# Altium PCB IMU_PCB_2024_4Layers_noBlindVias.PcbDoc
Units mm, origin at the board's own origin, x right, y up, seen from the top; angles counter-clockwise.
Board outline 9 x 7 mm, 4 copper layers (Top Layer, Top Layer 1, Bottom Layer 1, Bottom Layer), stack 0.537 mm thick; 16 components, 21 nets, 87 pads, 36 vias.
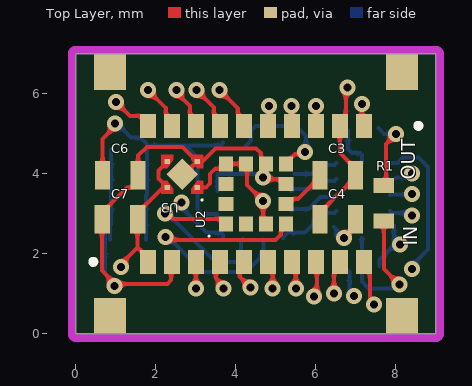
[diagram p0: Top Layer view]
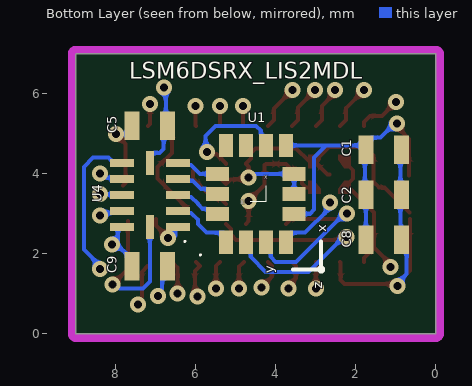
[diagram p1: Bottom Layer view, seen from below]
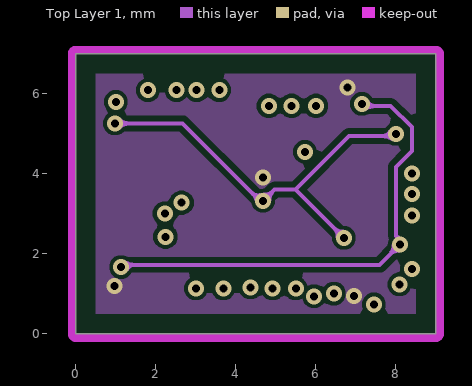
[diagram p2: Top Layer 1]
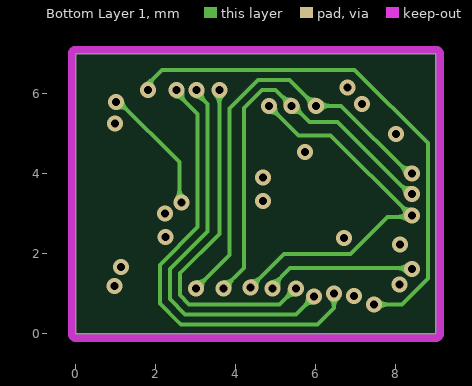
[diagram p3: Bottom Layer 1]
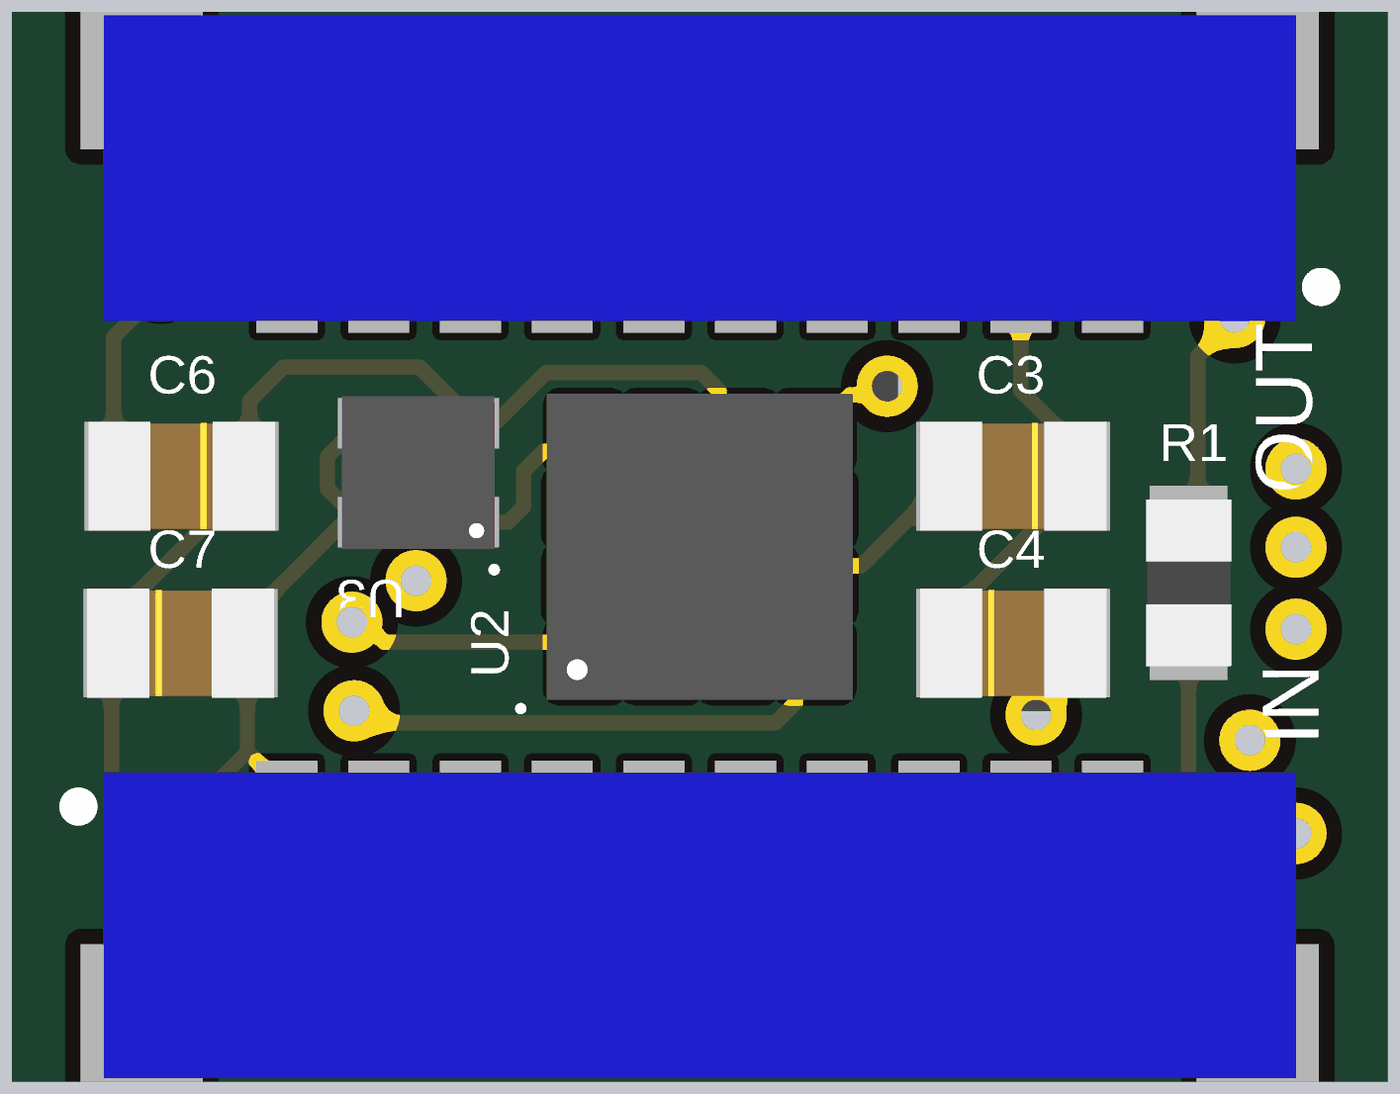
[diagram p4: 3D render of the assembled board from above, using the file's embedded part models]
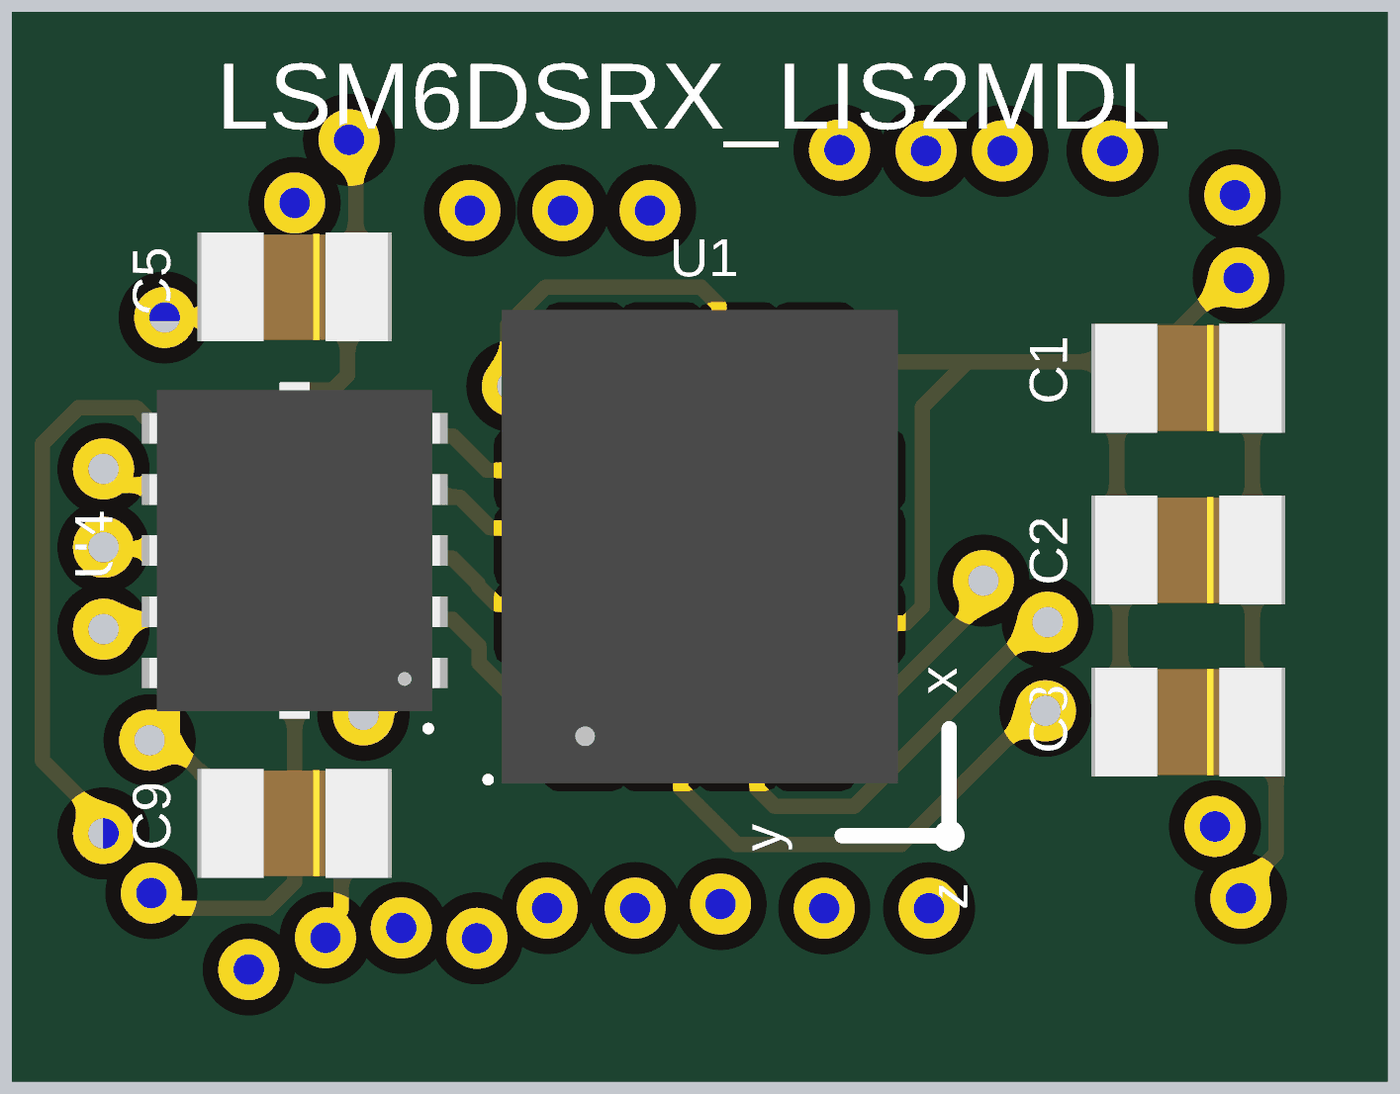
[diagram p5: 3D render of the assembled board from below, using the file's embedded part models]

## Layer stack, top to bottom
Top Solder: solder mask 0.0102, Solder Resist, Dk 3.5
Top Layer: signal copper 0.0356
Dielectric 2: prepreg 0.0711, PP-006, Dk 4.1
Top Layer 1: signal copper 0.035
Dielectric 1: core 0.254, FR-4, Dk 4.2
Bottom Layer 1: signal copper 0.035
Dielectric 3: prepreg 0.0711, PP-006, Dk 4.1
Bottom Layer: signal copper 0.0356
Solder Side: solder mask 0.0102, Solder Resist, Dk 3.5

## Board outline
0,7 0,0 9,0 9,7

## Design rules (kind name [scope] priority, off if disabled: settings)
Clearance Clearance_tracks [All] p1: gap=0.1 ignorepadtopadclearanceinfootprint=FALSE except(0: Arc-Hole Track-Hole SMDPad-Hole THPad-Hole Via-Hole Fill-Hole Poly-Hole Region-Hole Text-Hole; 0.15: Arc-Arc Arc-Track Arc-SMDPad Arc-THPad Arc-Via Arc-Fill Arc-Poly Arc-Region Track-Track Track-SMDPad Track-THPad Track-Via Track-Fill Track-Poly Track-Region)
Clearance Clearance_3 [OnLayer('Power Plane (VCC)') or InNet('4V')] p2: gap=0.254 ignorepadtopadclearanceinfootprint=FALSE except(0: Arc-Hole Track-Hole SMDPad-Hole THPad-Hole Via-Hole Fill-Hole Poly-Hole Region-Hole Text-Hole)
Clearance Clearance_2 [(InComponent('MPU-9250') AND OnLayer('Bottom Layer') AND HasFootprint('MPU-2950'))] p3: gap=0.1 ignorepadtopadclearanceinfootprint=FALSE except(0: Arc-Hole Track-Hole SMDPad-Hole THPad-Hole Via-Hole Fill-Hole Poly-Hole Region-Hole Text-Hole)
Clearance keepout [OnLayer('Keep-Out Layer')] p4: gap=0.1 ignorepadtopadclearanceinfootprint=FALSE except(0: Arc-Hole Track-Hole SMDPad-Hole THPad-Hole Via-Hole Fill-Hole Poly-Hole Region-Hole Text-Hole)
Clearance "Clearance - Vias Pad" [IsVia vs IsPad] p5: gap=0.1 ignorepadtopadclearanceinfootprint=FALSE except(0: Arc-Hole Track-Hole SMDPad-Hole THPad-Hole Via-Hole Fill-Hole Poly-Hole Region-Hole Text-Hole)
Clearance "Clearance Pad to Pad" [IsPad vs IsPad] p6: gap=0.1 ignorepadtopadclearanceinfootprint=FALSE except(0: Arc-Hole Track-Hole SMDPad-Hole THPad-Hole Via-Hole Fill-Hole Poly-Hole Region-Hole Text-Hole)
Clearance [All] p7: gap=0.1 ignorepadtopadclearanceinfootprint=FALSE except(0: Arc-Hole Track-Hole SMDPad-Hole THPad-Hole Via-Hole Fill-Hole Poly-Hole Region-Hole Text-Hole)
DiffPairsRouting [All] p1: maxlimit=0.254 minlimit=0.254 mostfreqgap=0.254 toplayer_minwidth=0.2 toplayer_maxwidth=0.381 toplayer_prefwidth=0.254 midlayer1_minwidth=0.2 midlayer1_maxwidth=0.381 midlayer1_prefwidth=0.254 midlayer2_minwidth=0.2 midlayer2_maxwidth=0.381 midlayer2_prefwidth=0.254 bottomlayer_minwidth=0.2 bottomlayer_maxwidth=0.381 bottomlayer_prefwidth=0.254 maxuncoupledlength=12.7
HoleToHoleClearance [All] p1: gap=0.1 allowstackedmicrovias=TRUE
MinimumSolderMaskSliver [All] p1: minsoldermaskwidth=0.02
PlaneConnect [All] p1: planeconnectstyle=Direct reliefexpansion=0.508 reliefentries=4 reliefconductorwidth=0.254 reliefairgap=0.254
PolygonConnect [All] p1: connectstyle=Direct reliefconductorwidth=0.254 reliefentries=4 polygonreliefangle="90 Angle" airgapwidth=0.254
RoutingLayers RoutingLayersPWR [(InNet('4V') OR InNet('5V') OR InNet('5V NON ISOLATED'))] p2: top layer_v5=TRUE mid layer 1_v5=TRUE mid layer 2_v5=TRUE bottom layer_v5=TRUE
RoutingPriority "RountingPriority Power" [(InNet('GND') OR InNet('POWER GND') OR InNet('5V') OR InNet('5V NON ISOLATED') OR InNet('24V'))] p1: routingpriority=10
RoutingPriority "RoutingPriority RS485" [(InNet('RS485_N') OR InNet('RS485_P'))] p2: routingpriority=8
RoutingPriority "RoutingPriority Hard Ones" [(InNet('SIGNAL 1 A') OR InNet('SIGNAL 1 B') OR InNet('SIGNAL 1 C') OR InNet('SIGNAL 3 A') OR InNet('SIGNAL 3 B') OR InNet('SIGNAL 3 C'))] p3: routingpriority=6
RoutingPriority [All] p4: routingpriority=0
RoutingVias [All] p1: holewidth=0.2 width=0.4 viastyle="Through Hole" minholewidth=0.2 minwidth=0.4 maxholewidth=0.35 maxwidth=0.7
SMDNeckDown [All] p1: percent=90.000
SilkToSilkClearance [All] p1: silktosilkclearance=0.1
SilkToSolderMaskClearance SilkscreenOverComponentPads [IsPad] p1: minsilkscreentomaskgap=0.02 clearancetoexposedcopper=FALSE
SolderMaskExpansion SolderMaskExpansion_via [IsVia] p1: expansion=-0.4 istentingtop=FALSE
SolderMaskExpansion [All] p2: expansion=0.102 istentingtop=FALSE
Width [All] p1: maxlimit=2 minlimit=0.1 preferedwidth=0.1 minimp=50.000000 maximp=50.000000 favimp=50.000000
Width "Width PowerPlane" [All] p2: maxlimit=0.635 minlimit=0.508 preferedwidth=0.508
23 further rules are at their usual default settings.

## Components (designator, comment, footprint, x,y, rotation, side; value= is the part's Value field where it differs from the comment)
C1 "100nF" C0402 1.304,4.603 r0 bottom
C2 "100nF" C0402 1.304,3.478 r0 bottom
C3 "220nF" C0402 6.55,3.962 r180 top
C4 "100nF" C0402 6.55,2.869 r0 top
C5 "10uF" C0402 7.15,5.2 r0 bottom
C6 "1uF" C0402 1.111,3.962 r180 top
C7 "1uF" C0402 1.104,2.869 r0 top
C8 "100nF" C0402 1.304,2.353 r0 bottom
C9 "100nF" C0402 7.15,1.69 r0 bottom
IN "JST SM10B-XSRS-ETB" SM10B-XSRS-ETB 4.5,1.8 r0 top
OUT "JST SM10B-XSRS-ETB" SM10B-XSRS-ETB 4.5,5.2 r180 top
R1 "10K" R0402 7.073,-0.211 r90 top
U1 "LSM6DSRXTR" LSM6 4.5,3.5 r90 bottom locked
U2 "LIS2MDLTR" LIS 4.5,3.5 r90 top
U3 "LD39020ADTPU18R" LD3 2.66,3.985 r180 top
U4 "HPA01164RUTR" RUT12 7.15,3.475 r0 bottom locked

## Footprints (in the part's own frame and the unit in brackets; to place one, negate y for a bottom-side part, rotate by r counter-clockwise, add the part's x,y. Pads: shape width x height; smd on the part's side, far side on the other; paste and mask are expansions set on the pad)
C0402 [mil]
  rect 15x28 smd paste+0 mask+0: 1(-17.5,0) 2(17.5,0)
  body extent -24,-14 24,14, height 28
LD3 [mil]
  rect 5x5 smd paste-2.5 mask-2.5: 1(-14.75,12.75) 2(-14.75,-12.75) 3(14.75,-12.75) 4(14.75,12.75)
  rect 22x22 smd rot 45 paste-11 mask+0: 5(0,0)
  Top Layer region: 0,11 0,11 0,11 0,11 0,11 0,11 0,11 0,11
  Top Layer region: 0,-11 0,-11 0,-11 0,-11 0,-11 0,-11 0,-11 0,-11
  Top Layer region: 20.75,19.25 20.75,6.25 14.75,6.25 8.75,14.25 8.75,19.25
  Top Layer region: -20.75,-19.25 -20.75,-6.25 -14.75,-6.25 -8.75,-14.25 -8.75,-19.25
  Top Layer region: 20.75,-19.25 20.75,-6.25 14.75,-6.25 8.75,-14.25 8.75,-19.25
  Top Layer region: -20.75,19.25 -20.75,6.25 -14.75,6.25 -8.75,14.25 -8.75,19.25
  silkscreen extent -20,25 -19,25, body extent -20,-20 20,20, height 16
LIS [mm]
  rect 0.377x0.352 smd paste+0 mask+0.102: 1(-0.75,0.75) 2(-0.75,0.25) 3(-0.75,-0.25) 4(-0.75,-0.75) 7(0.75,-0.75) 8(0.75,-0.25) 9(0.75,0.25) 10(0.75,0.75)
  rect 0.352x0.377 smd paste+0 mask+0.102: 5(-0.25,-0.75) 6(0.25,-0.75) 11(0.25,0.75) 12(-0.25,0.75)
  silkscreen extent -1.07,1.16 -1.05,1.18, body extent -1,-1 1,1, height 0.7
LSM6 [mm]
  rect 0.577x0.352 smd paste+0 mask+0.102: 1(-1.21,0.75) 2(-1.21,0.25) 3(-1.21,-0.25) 4(-1.21,-0.75) 8(1.21,-0.75) 9(1.21,-0.25) 10(1.21,0.25) 11(1.21,0.75)
  rect 0.352x0.577 smd paste+0 mask+0.102: 5(-0.5,-0.956) 6(0,-0.956) 7(0.5,-0.956) 12(0.5,0.956) 13(0,0.956) 14(-0.5,0.956)
  silkscreen extent -1.54,-0.25 0.2,1.4, body extent -1.55,-1.3 1.55,1.3, height 0.87
R0402 [mil]
  rect 15x20 smd paste+0 mask+0: 1(119.31,-24.61) 2(154.31,-24.61)
  body extent 115,-36 158,-14, height 16
RUT12 [mm]
  rect 0.6x0.2 smd paste+0 mask+0: 1(-0.7,0.8) 2(-0.7,0.4) 3(-0.7,0) 4(-0.7,-0.4) 5(-0.7,-0.8) 7(0.7,-0.8) 8(0.7,-0.4) 9(0.7,0) 10(0.7,0.4) 11(0.7,0.8)
  rect 0.2x0.6 smd paste+0 mask+0: 6(0,-0.8) 12(0,0.8)
  silkscreen extent -0.89,1.15 -0.86,1.18, body extent -0.95,-1.1 0.95,1.1, height 0.6
SM10B-XSRS-ETB [mm] "JST XSR 10WAY angle, 0.6mm, SMD"
  rect 0.4x0.6 smd mask+0.05: 1(-2.7,0) 2(-2.1,0) 3(-1.5,0) 4(-0.9,0) 5(-0.3,0) 6(0.3,0) 7(0.9,0) 8(1.5,0) 9(2.1,0) 10(2.7,0)
  rect 0.8x0.9 smd: NC(-3.65,-1.35) NC(3.65,-1.35)
  silkscreen extent -4.11,-0.05 -4.01,0.05, body extent -3.9,-1.78 3.9,0.22, height 1.44

## Part data
C1 C2 C4 C8 C9: library part 04025C104KAT4A, "04025C104KAT4A", Mfr_Name=TDK
C3: library part C1005X5R1E224K050BC, "C1005X5R1E224K050BC", Mfr_Name=TDK
C5: library part 0402ZD106MAT2A, "0402ZD106MAT2A", Mfr_Name=TDK
C6 C7: library part 04023D105KAT2A, "04023D105KAT2A", Mfr_Name=TDK
IN OUT: library part SM10B-XSRS-ETB, "JST 10WAY angle XSR, SMT, 0.6mm, SM10B-XSRS-ETB", Manufacturer=JST, Supplier Part Number 1=90W0858, Catalogue Price=1,192, Category=Connecteurs, ComponentLink1Description=http://datasheet.octopart.com/SM10B-XSRS-ETB-JST-datasheet-12514066.pdf, ComponentLink1URL=http://datasheet.octopart.com/SM10B-XSRS-ETB-JST-datasheet-12514066.pdf, ComponentLink2Description=http://www.farnell.com/datasheets/1706598.pdf, ComponentLink2URL=http://www.farnell.com/datasheets/1706598.pdf, Contact Material=Copper, Contact Plating=Tin, Contact Termination Type="Through Hole", contact_material=Copper, contact_plating=Tin, Courant=0.2A, Currency=EUR, gender=Male, Manufacturer Part Number=SM10B-XSRS-ETB, Matériau du contact="Alliage de cuivre", Minimum Order Quantity=5, mounting_style="Through Hole", Méthode de raccordement="Montage en surface", No. of Contacts=10, No. of Rows=1, Nombre de contacts=10, Nombre de rangées=1, number_of_contacts=10, Numéro de série=SM10B, Octopart Url=http://octopart.com/sm10b-xsrs-etb-jst-29522047, OctopartID=60b7a87f3daebf70, Orientation du corps=Droit, Pas=0.6mm, Pitch Spacing=0.6, Product Range="XSR Series", Product Status=IN_STOCK, Product StockNumber=820-1677, RoHS=YES, rohs_status=Compliant, Seller Landing  Url=https://octopart-clicks.com/click/track?country=IT&ak=8157f166&sig=06796d5&sid=2402&ppid=29522047&vpid=200245201&ct=offers, Stock 1=0, Stock 2=0, Supplier 1=Newark, Supplier 2=RS-Components, Supplier Part Number 2=820-1677, Séries=XSR, Tension="30 V c.a./c.c.", Type="Fil à carte"
R1: library part RMCF0402FT10K0, "No Description Available", Mfr_Name="Stackpole International"
U1 U2 U3: "No Description Available", Mfr_Name=STMicroelectronics, RefDes=RefDes, Type=Type
U4: "No Description Available", Mfr_Name="Texas Instruments", RefDes=RefDes, Type=Type

## Via types
v1: diameter 0.4, hole 0.2, Top Layer to Bottom Layer, 36 vias

## Nets (pads, with @x,y where several pads share a name; then routed paths per layer and width w, separated by ;. In a path a pad name is that pad's centre, name@x,y a point inside that pad or via, vN(x,y) a via of type N, cw(c..) or ccw(c..) an arc to the next point about the centre after c; other vN are vias at no path point)
1V8: C1.2 C2.2 C4.2 C5.2 C6.2 C8.2 R1.2 U1.5 U1.8 U2.3 U2.9 U2.10 U3.1 U4.1 | length 25.8
  Top Layer w0.1: C6.2 0.667,4.871 0.97,5.174 v1@0.97,5.253 ; U3.1 3.248,3.661 3.348,3.761 3.348,3.995 3.479,4.126 3.626,4.126 U2.10 U2.9 4.281,4.219 4.281,3.727 4.583,3.425 4.583,3.359 v1@4.551,3.327 ; v1(4.681,3.327) v1@4.551,3.327 ; U2.3 4.681,2.819 4.681,3.197 v1@4.551,3.327 ; v1@6.757,2.457 v1(6.7,2.4) 6.7,2.409 6.994,2.704 C4.2 ; R1.2@7.82,3.709 7.757,3.772 7.757,4.748 8,4.99 v1(8,5)
  Top Layer 1 w0.1: v1(0.976,5.259) 2.67,5.259 4.559,3.37 4.734,3.37 4.971,3.606 5.494,3.606 ; v1(6.7,2.4) 5.494,3.606 ; v1(8,5) 7.944,4.944 6.832,4.944 5.494,3.606
  Bottom Layer w0.1: v1(0.976,5.259) 1.033,5.259 1.383,4.909 1.608,4.909 1.773,4.743 C1.2@1.773,4.603 ; C8.2 1.748,3.453 1.773,3.478 C1.2@1.773,4.603 ; U1.5 3.15,3 3.044,3.106 3.044,4.414 2.748,4.71 ; U1.8@3.682,4.786 3.682,4.768 3.624,4.71 2.748,4.71 ; U4.1 6.459,2.675 6.509,2.625 6.509,2.457 6.643,2.457 v1(6.7,2.4) ; C5.2@7.569,5.141 7.71,5 v1(8,5) ; C1.2@1.773,4.603 1.88,4.71 2.748,4.71
CSI: IN.6 U4.7 | length 8.3
  Top Layer w0.1: IN.6 4.922,1.678 v1(4.922,1.136)
  Bottom Layer 1 w0.1: v1(4.922,1.136) 4.922,1.209 5.354,1.641 8.384,1.641 v1(8.4,1.624)
  Bottom Layer w0.1: U4.7 8.05,4.275 8.184,4.409 8.566,4.409 8.8,4.175 8.8,2.103 8.4,1.703 v1(8.4,1.624)
Csi_1V8: U1.12 U4.5 | length 1.2
  Bottom Layer w0.1: U1.12@5.464,4 5.892,4 6.117,4.225 6.464,4.225 U4.5@6.514,4.275
GND: C1.1 C2.1 C3.1 C4.1 C5.1 C6.1 C7.1 C8.1 C9.1 IN.2 OUT.2 U1.6 U1.7 U2.6 U2.8 U3.2 U3.5 U4.6 | length 23.3
  Top Layer w0.1: C7.1@0.652,2.869 0.652,1.578 0.96,1.269 v1(0.96,1.2) ; C7.1@0.66,3.034 1.282,3.656 1.415,3.656 1.556,3.797 C6.1 ; v1@1,1.2 1.05,1.25 2.287,1.25 2.38,1.343 2.38,1.78 IN.2 ; C6.1 1.556,4.455 1.774,4.674 2.67,4.674 U3.2@3.021,4.322 ; U3.5 2.711,3.985 3.021,4.295 U3.2 ; U3.2@3.021,4.322 U3.2 ; v1@4.651,3.934 4.724,3.862 5.138,3.862 U2.6 U2.6@5.362,3.862 ; v1(4.681,3.904) 4.681,4.181 U2.8 4.75,4.264 4.626,4.388 4.626,4.521 4.509,4.638 3.491,4.638 3.175,4.322 3.048,4.322 U3.2 ; C4.1@6.246,3.196 6.27,3.196 6.955,3.881 6.955,4.166 6.6,4.522 OUT.2 ; OUT.2@6.6,5.1 OUT.2 ; v1(6.794,6.162) 6.75,6.118 6.75,5.35 OUT.2
  Bottom Layer w0.1: C8.1 0.859,2.709 ; C1.1@0.884,4.603 0.884,2.734 0.859,2.709 ; v1(0.96,1.2) 0.96,1.266 0.73,1.496 0.73,2.558 0.758,2.558 0.859,2.659 0.859,2.709 ; U1.6@3.544,3.576 U1.7 ; U1.7@3.552,4 4.504,4 4.6,3.904 v1(4.681,3.904) ; C5.1@6.68,5.2 6.803,5.077 6.803,4.625 6.903,4.525 7.1,4.525 7.15,4.475 U4.6 ; C9.1 6.846,1.549 6.846,1.125 6.948,1.023 v1(6.948,0.942) ; C5.1 6.75,5.245 6.75,6.118 v1(6.794,6.162)
INT1: OUT.10 U1.4 | length 5.9
  Top Layer w0.1: v1(1,5.8) 1.35,5.45 1.65,5.45 1.8,5.3 OUT.10
  Bottom Layer 1 w0.1: v1(1,5.8) 1.079,5.8 2.588,4.291 2.588,3.334 v1(2.644,3.278)
  Bottom Layer w0.1: v1(2.644,3.278) 2.702,3.221 2.702,3.095 3.269,2.528 3.624,2.528 3.682,2.47 U1.4@3.682,2.366
INT2: U1.9 U2.7 | length 3
  Top Layer w0.1: U2.7 5.25,4.263 5.48,4.493 5.668,4.493 v1(5.726,4.55)
  Bottom Layer w0.1: U1.9 4.374,4.835 4.374,5.081 4.491,5.199 5.509,5.199 5.757,4.95 5.757,4.581 v1(5.726,4.55)
NetC3_2: C3.2 U2.5 | length 1.3
  Top Layer w0.1: U2.5 5.374,3.374 5.553,3.374 6.066,3.888 C3.2@6.066,4.07
NetIN_7: IN.7 OUT.6 | length 10.6
  Top Layer w0.1: v1(3.586,6.096) 4.05,5.631 4.05,5.35 OUT.6 ; IN.7 5.498,1.702 v1(5.498,1.136)
  Bottom Layer 1 w0.1: v1(3.586,6.096) 3.586,2.501 2.6,1.515 2.6,0.969 2.834,0.734 5.097,0.734 v1(5.498,1.136)
NetIN_8: IN.8 OUT.7 | length 11.8
  Top Layer w0.1: v1(3.02,6.09) 3.45,5.66 3.45,5.35 OUT.7 ; v1(5.957,0.938) 6.027,1.008 6.027,1.047 6.027,1.569 5.898,1.698 IN.8
  Bottom Layer 1 w0.1: v1@3.02,6.096 3.02,6.016 3.294,5.742 3.294,2.563 2.35,1.619 2.35,0.865 2.731,0.484 5.503,0.484 v1(5.957,0.938)
NetIN_9: IN.9 OUT.8 | length 13
  Top Layer w0.1: v1(2.52,6.09) 2.52,6.024 2.85,5.694 2.85,5.35 OUT.8 ; v1(6.452,1.006) 6.452,1.652 IN.9
  Bottom Layer 1 w0.1: v1(2.52,6.09) 2.52,6.024 3.044,5.5 3.044,2.666 2.1,1.722 2.1,0.762 2.598,0.264 2.627,0.234 5.234,0.234 6.04,0.234 6.452,0.647 v1(6.452,1.006)
NetIN_10: IN.10 OUT.9 | length 15.1
  Top Layer w0.1: v1(1.8,6.09) 2.25,5.64 2.25,5.35 OUT.9 ; IN.10@7.205,1.695 7.35,1.55 7.35,0.916 7.45,0.816 v1(7.45,0.734)
  Bottom Layer 1 w0.1: v1@1.8,6.25 2.15,6.6 6.966,6.6 8.8,4.766 8.8,1.381 8.153,0.734 v1(7.45,0.734)
NetR1_1: R1.1 U4.12 | length 3.9
  Top Layer w0.1: R1.1 7.698,1.623 v1(8.087,1.234)
  Bottom Layer w0.1: U4.12@7.15,2.411 7.15,1.306 7.321,1.134 7.906,1.134 8.006,1.234 v1(8.087,1.234)
NetU1_2: U1.2 U2.4 | length 6.7
  Top Layer w0.1: v1(2.239,2.427) 2.32,2.427 2.399,2.348 4.995,2.348 5.126,2.479 5.126,2.626 U2.4
  Bottom Layer w0.1: v1(2.239,2.427) 2.305,2.427 3.18,1.551 4.259,1.551 4.626,1.919 4.626,2.051 4.688,2.114 U1.2@4.688,2.36
NetU1_3: U1.3 U2.1 | length 4.6
  Top Layer w0.1: v1(2.225,3.006) 2.306,3.006 2.438,2.874 3.626,2.874 U2.1
  Bottom Layer w0.1: v1(2.225,3.006) 2.286,3.006 3.491,1.801 4.009,1.801 4.126,1.919 4.126,2.309 U1.3@4.182,2.366
SCK: IN.3 OUT.3 U4.8 | length 12.3
  Top Layer w0.1: v1(3,1.134) IN.3 ; OUT.3 6.003,5.203 v1@6.003,5.653
  Bottom Layer 1 w0.1: v1(3,1.134) 3.836,1.97 3.836,5.63 4.556,6.35 5.34,6.35 5.956,5.734 6.003,5.734 6.038,5.7 6.634,5.7 8.324,4.009 v1(8.4,4.009)
  Bottom Layer w0.1: U4.8@7.996,3.886 8.013,3.902 8.311,3.902 8.4,3.992 v1(8.4,4.009)
  other v1: 6.003,5.7
SCK_1V8: U1.13 U4.4 | length 1.2
  Bottom Layer w0.1: U1.13@5.388,3.576 5.437,3.624 5.87,3.624 6.071,3.825 6.464,3.825 U4.4@6.514,3.875
SDI: IN.4 OUT.4 U4.9 | length 12
  Top Layer w0.1: IN.4 3.5,1.7 3.5,1.391 3.685,1.206 v1(3.685,1.134) ; v1@5.395,5.695 5.395,5.205 OUT.4
  Bottom Layer 1 w0.1: v1(3.685,1.134) 4.201,1.65 4.201,5.642 4.659,6.1 4.995,6.1 v1(5.395,5.7) 5.438,5.7 5.808,5.329 5.838,5.3 6.544,5.3 8.347,3.497 v1(8.4,3.497)
  Bottom Layer w0.1: U4.9 7.861,3.486 8.389,3.486 v1(8.4,3.497)
SDI_1V8: U1.14 U4.3 | length 1.3
  Bottom Layer w0.1: U1.14@5.388,3.076 5.437,3.124 5.827,3.124 5.95,3.247 5.95,3.258 6.117,3.425 6.464,3.425 U4.3@6.514,3.475
SDO: IN.5 OUT.5 U4.10 | length 11.4
  Top Layer w0.1: IN.5 4.097,1.697 4.097,1.429 v1(4.364,1.162) ; OUT.5 4.825,5.225 v1(4.825,5.7)
  Bottom Layer 1 w0.1: v1(4.364,1.162) 5.202,2 6.866,2 7.788,2.923 8.362,2.923 v1(8.4,2.961) ; v1(4.825,5.7) 5.563,4.962 6.369,4.962 8.365,2.966 v1@8.365,2.961
  Bottom Layer w0.1: U4.10 7.9,3.025 8.255,3.025 8.319,2.961 v1(8.4,2.961)
SDO_1V8: U1.1 U4.2 | length 1.7
  Bottom Layer w0.1: U1.1@5.182,2.402 5.308,2.528 5.731,2.528 5.945,2.741 5.945,2.852 6.117,3.025 6.464,3.025 U4.2@6.514,3.075
VDD: C7.2 C9.2 IN.1 OUT.1 U3.3 U3.4 U4.11 | length 17.6
  Top Layer w0.1: v1(1.13,1.67) 1.13,1.748 1.541,2.159 ; IN.1 1.8,1.9 1.541,2.159 ; U3.4@2.272,3.674 U3.4 2.272,3.648 2.162,3.648 1.549,3.034 1.541,3.026 1.541,2.159 ; U3.4@2.272,3.675 2.065,3.882 2.065,4.088 2.272,4.295 U3.3 ; v1(7.15,5.749) 7.15,5.25 OUT.1
  Top Layer 1 w0.1: v1(1.13,1.67) 1.186,1.726 7.591,1.726 8,2.136 8.096,2.136 8.098,2.134 8.098,2.362 8,2.46 8,4.175 8.4,4.575 8.4,5.166 7.872,5.693 7.206,5.693 v1(7.15,5.749)
  Bottom Layer w0.1: C9.2 7.594,1.855 7.95,2.211 v1@7.95,2.234 ; U4.11@7.95,2.711 v1@7.95,2.234 ; v1(8.098,2.234) v1@7.95,2.234
pads on no net: IN.NC OUT.NC U1.10 U1.11 U2.2 U2.11 U2.12

## Polygon pours and split planes (outlines as drawn)
GND on Top Layer 1 "GND_L02_P000" (solid, pour order 0): 0.5,6.5 8.5,6.5 8.5,0.5 0.5,0.5

## Keep-outs
Keep-Out Layer:
  lines w0.2: -0.1,0 ccw(c0,0) 0,-0.1 ; -0.1,0 ccw(c0,0) 0,-0.1 ; -0.1,0 -0.1,7 ; -0.1,7 cw(c0,7) 0,7.1 ; -0.1,7 cw(c0,7) 0,7.1 ; 0,-0.1 9,-0.1 ; 0,7.1 9,7.1 ; 9,-0.1 ccw(c9,0) 9.1,0 ; 9,-0.1 ccw(c9,0) 9.1,0 ; 9,7.1 cw(c9,7) 9.1,7 ; 9,7.1 cw(c9,7) 9.1,7 ; 9.1,0 9.1,7

## Silkscreen, mask and mechanical layers (free items; w line width, h text height)
Bottom Overlay:
  circle w0.1: c2.868,1.609 r0.05
  lines w0.1: 2.868,2.309 2.868,1.609 3.568,1.609
  text "LSM6DSRX_LIS2MDL" at 7.661,6.234 h0.7
  text "x" at 3.004,2.539 h0.4 r90
  text "y" at 3.968,1.509 h0.4 r270
  text "z" at 2.75,1.125 h0.4 r270

## Text inside footprints (layer, text, board x,y; h text height)
U1: Bottom Overlay "X" at 4.199,3.822 h0.15; Bottom Overlay "Y" at 4.807,3.365 h0.15 r180